# Altium PCB PCB_DCMotor.PcbDoc (part 1 of 2)
Units mm, origin at the board's own origin, x right, y up, seen from the top; angles counter-clockwise.
Board outline 135.2 x 115 mm, 2 copper layers (Top Layer, Bottom Layer); 232 components, 119 nets, 709 pads, 158 vias.
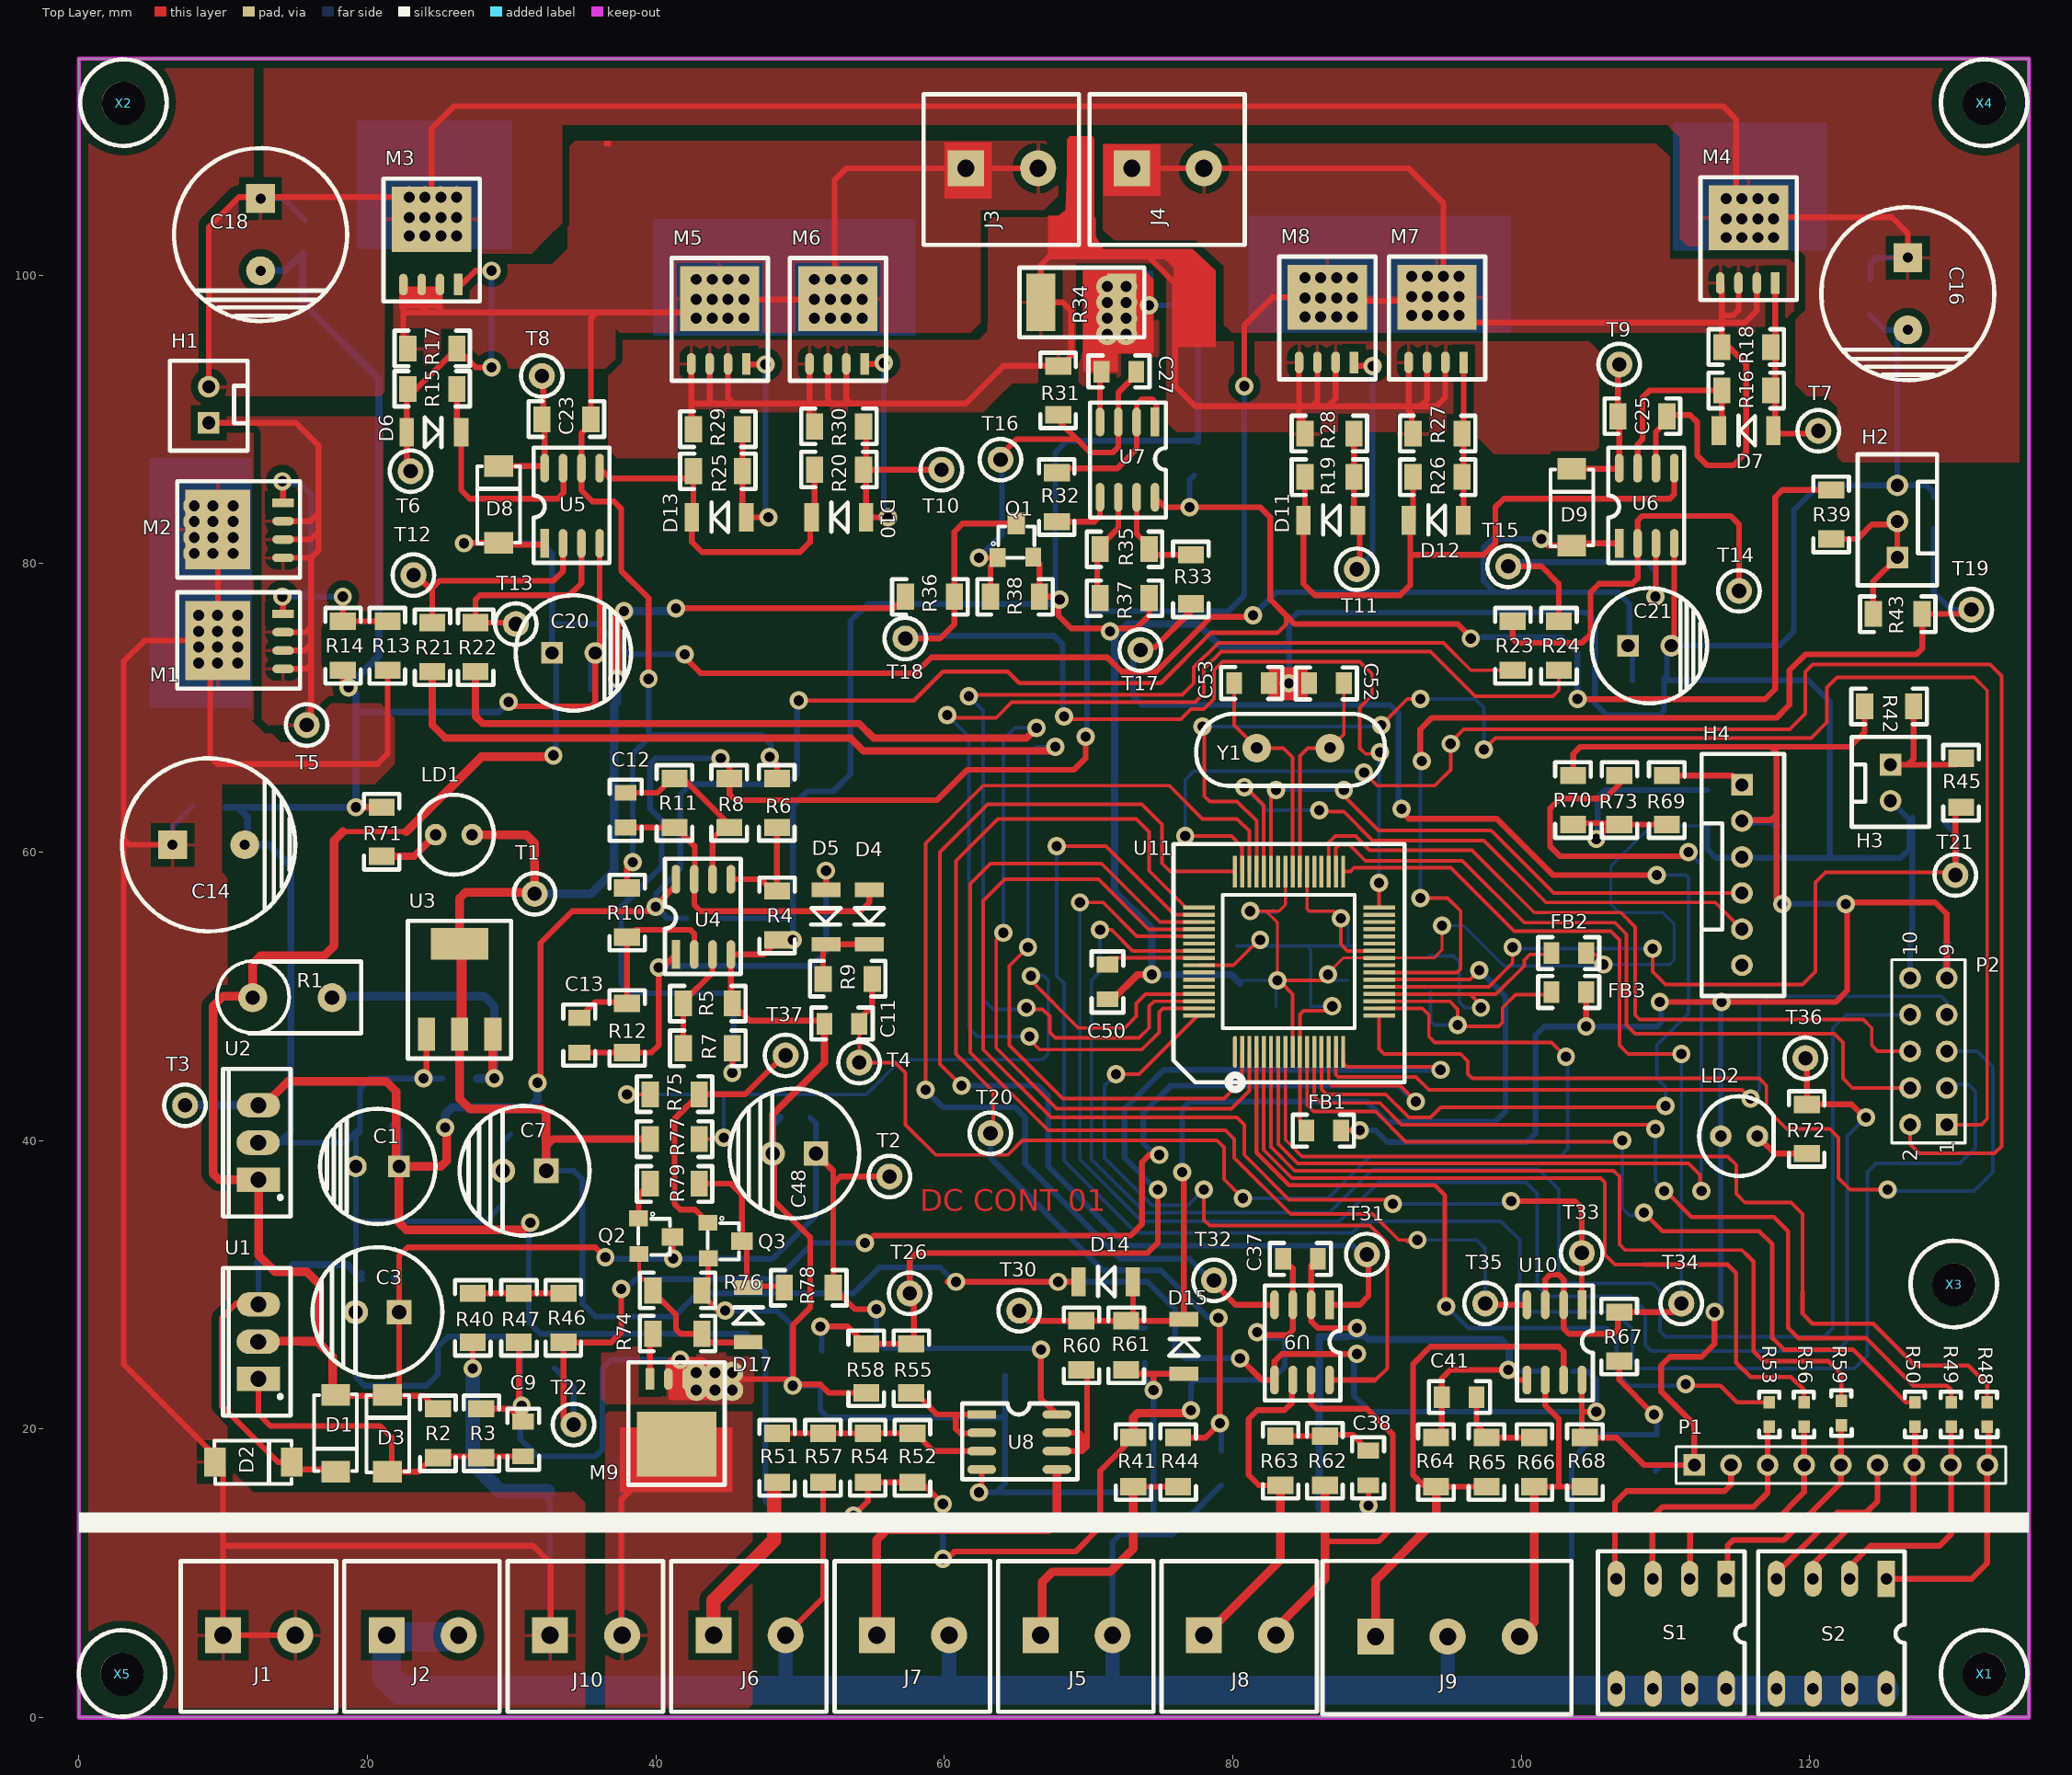
[diagram p0: Top Layer view]
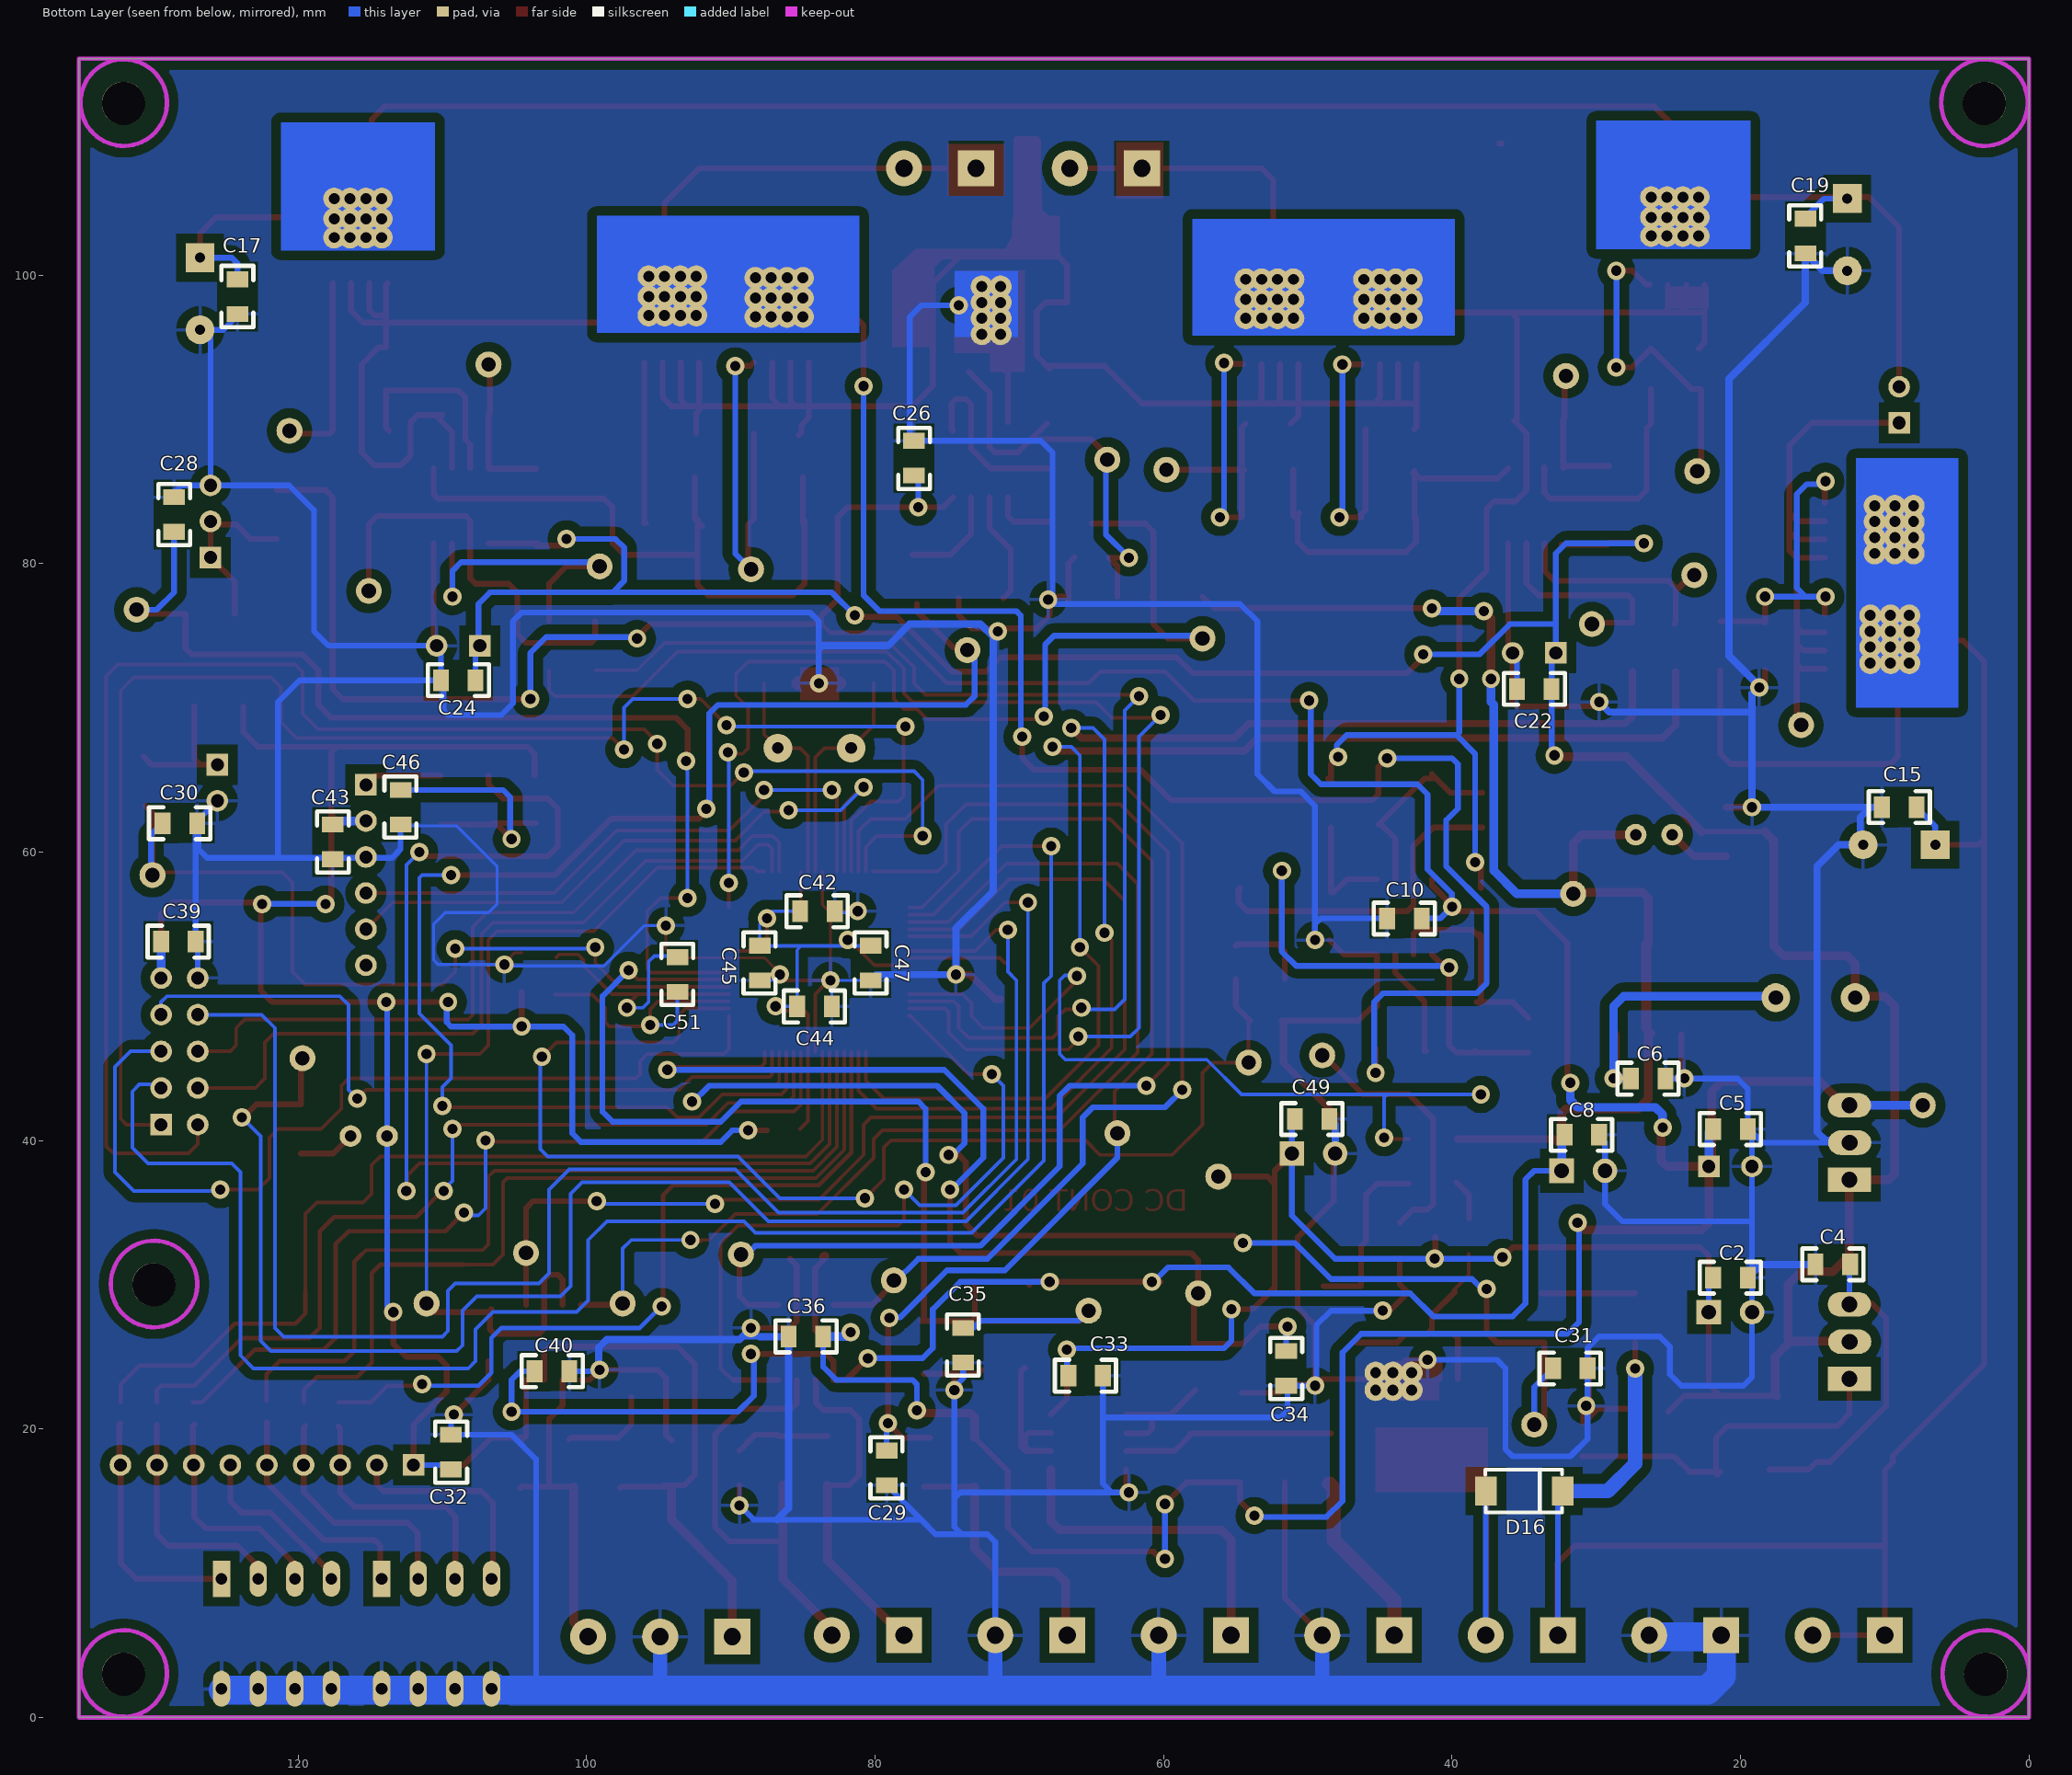
[diagram p1: Bottom Layer view, seen from below]

## Layer stack, top to bottom
Top Layer: signal copper 0.0356
Dielectric: dielectric 0.32, FR-4, Dk 4.8
Bottom Layer: signal copper 0.0356

## Board outline
0,115 0,0 135.2,0 135.2,3.4 135.2,115

## Design rules (kind name [scope] priority, off if disabled: settings)
Clearance [All] p1: gap=0.2
HoleSize [All] p1: absolutevalues=TRUE maxlimit=100 minlimit=0.003 maxpercent=80.000 minpercent=20.000
PolygonConnect [All] p1: connectstyle=Relief reliefconductorwidth=0.254 reliefentries=4 polygonreliefangle="90 Angle"
RoutingVias [All] p1: holewidth=0.711 width=1.27 viastyle="Through Hole" minholewidth=0.711 minwidth=1.27 maxholewidth=0.711 maxwidth=1.27
SolderMaskExpansion [All] p1: expansion=0.102
TestPointUsage [All] p1: valid=0 allowmultiple=FALSE
Testpoint [All] p1: side=15 testpointundercomponent=TRUE minsize=1.016 maxsize=2.54 preferedsize=1.524 minholesize=0 maxholesize=1.016 preferedholesize=0.813 testpointgrid=0.025 style=1023 order=0-112345678
Width [All] p1: maxlimit=100 minlimit=0.2 preferedwidth=0.3
18 further rules are at their usual default settings.

## Classes and differential pairs
component class PG01_Power_Supply: C1 C2 C3 C4 C5 C6 C7 C8 C9 C10 C11 C12 C13 D1 D2 D3 D4 D5 HS1 J1 J2 R1 R2 R3 R4 R5 R6 R7 R8 R9 R10 R11 R12 T1 T2 T3 T4 U1 U2 U3 U4 X1 X2 X3 X4
component class PG02_Full_Bridge: C14 C15 C16 C17 C18 C19 C20 C21 C22 C23 C24 C25 C26 C27 D6 D7 D8 D9 D10 D11 D12 D13 H1 HS2 HS3 HS4 HS5 J3 J4 M1 M2 M3 M4 M5 M6 M7 M8 Q1 R13 R14 R15 R16 R17 R18 R19 R20 R21 R22 R23 R24 R25 R26 R27 R28 R29 R30 R31 R32 R33 R34 R35 R36 R37 R38 T5 T6 T7 T8 T9 T10 T11 T12 T13 T14 T15 T16 T17 T18 U5 U6 U7
component class PG03_Analog_Digital_Inputs: C28 C29 C30 C31 C32 C33 C34 C35 D14 D15 H2 H3 J5 J6 J7 P1 R39 R40 R41 R42 R43 R44 R45 R46 R47 R48 R49 R50 R51 R52 R53 R54 R55 R56 R57 R58 R59 R60 R61 S1 S2 T19 T20 T21 T22 T23 T24 T25 T26 T27 T28 T29 T30 U8
component class PG04_Communications: C36 C37 C38 C39 C40 C41 J8 J9 P2 R62 R63 R64 R65 R66 R67 R68 T31 T32 T33 T34 T35 U9 U10
component class PG05_DSP_Circuit: C42 C43 C44 C45 C46 C47 C48 C49 C50 C51 C52 C53 D16 D17 FB1 FB2 FB3 H4 J10 LD1 LD2 M9 Q2 Q3 R69 R70 R71 R72 R73 R74 R75 R76 R77 R78 R79 T36 T37 U11 Y1

## Components (designator, comment, footprint, x,y, rotation, side; value= is the part's Value field where it differs from the comment)
C1 "Electrolyte Cap" "CAP 5MM" 20.7,38.2 r0 top
C2 "SMD 0805 10%" SMD0805 20.7,30.5 r180 bottom
C3 "Electrolyte Cap" CAP_8mm 20.7,28.1 r180 top
C4 "SMD 0805 10%" SMD0805 13.6,31.4 r0 bottom
C5 "SMD 0805 10%" SMD0805 20.7,40.8 r180 bottom
C6 "SMD 0805 10%" SMD0805 26.4,44.3 r180 bottom
C7 "Electrolyte Cap" CAP_8mm 30.9,37.9 r180 top
C8 "SMD 0805 10%" SMD0805 31,40.4 r180 bottom
C9 "SMD 0805 10%" SMD0805 30.8,19.3 r90 top
C10 "SMD 0805 10%" SMD0805 43.3,55.4 r180 bottom
C11 "SMD 0805 10%" SMD0805 52.9,48.1 r180 top
C12 "SMD 0805 10%" SMD0805 37.9,62.9 r90 top
C13 "SMD 0805 10%" SMD0805 34.7,47.3 r270 top
C14 "Electrolyte Cap" "CAP 10MM DIA" 9,60.5 r180 top
C15 "SMD 0805 10%" SMD0805 9,63.1 r0 bottom
C16 "Electrolyte Cap" "CAP 10MM DIA" 126.8,98.7 r90 top
C17 "SMD 0805 10%" SMD0805 124.2,98.5 r270 bottom
C18 "Electrolyte Cap" "CAP 10MM DIA" 12.6,102.8 r90 top
C19 "SMD 0805 10%" SMD0805 15.5,102.7 r270 bottom
C20 "100uF/25V" "CAP 5MM" 34.3,73.8 r180 top
C21 "100uF/25V" "CAP 5MM" 108.9,74.3 r180 top
C22 "SMD 0805 10%" SMD0805 34.3,71.3 r0 bottom
C23 "SMD 1206 10%" SMD1206 33.8,90 r0 top
C24 "SMD 0805 10%" SMD0805 108.9,71.9 r0 bottom
C25 "SMD 1206 10%" SMD1206 108.4,90.2 r0 top
C26 "SMD 0805 10%" SMD0805 77.3,87.3 r90 bottom
C27 "SMD 0805 10%" SMD0805 72.1,93.3 r180 top
C28 "SMD 0805 10%" SMD0805 128.6,83.4 r90 bottom
C29 "SMD 0805 10%" SMD0805 79.2,17.3 r270 bottom
C30 "SMD 0805 10%" SMD0805 128.2,62 r180 bottom
C31 "SMD 0805 10%" SMD0805 31.8,24.2 r180 bottom
C32 "SMD 0805 10%" SMD0805 109.4,18.4 r90 bottom
C33 "SMD 0805 10%" SMD0805 65.4,23.7 r180 bottom
C34 "SMD 0805 10%" SMD0805 51.5,24.2 r90 bottom
C35 "SMD 0805 10%" SMD0805 73.9,25.8 r270 bottom
C36 "SMD 0805 10%" SMD0805 84.8,26.4 r0 bottom
C37 "SMD 0805 10%" SMD0805 84.7,31.8 r0 top
C38 "SMD 0805 10%" SMD0805 89.4,17.3 r270 top
C39 "SMD 0805 10%" SMD0805 128.3,53.8 r180 bottom
C40 "SMD 0805 10%" SMD0805 102.4,24 r0 bottom
C41 "SMD 0805 10%" SMD0805 95.7,22.2 r180 top
C42 "SMD 0805 10%" SMD0805 84,55.9 r180 bottom
C43 "SMD 0805 10%" SMD0805 117.6,60.7 r90 bottom
C44 "SMD 0805 10%" SMD0805 84.2,49.3 r180 bottom
C45 "SMD 0805 10%" SMD0805 88,52.3 r270 bottom
C46 "SMD 0805 10%" SMD0805 112.9,63.1 r270 bottom
C47 "SMD 0805 10%" SMD0805 80.3,52.3 r270 bottom
C48 "Cap 5mm radial" CAP_8mm 49.6,39.1 r180 top
C49 "SMD 0805 10%" SMD0805 49.7,41.5 r180 bottom
C50 "SMD 0805 10%" SMD0805 71.3,51 r90 top
C51 "SMD 0805 10%" SMD0805 93.7,51.5 r270 bottom
C52 "SMD 0805 10%" SMD0805 86.5,71.7 r0 top
C53 "SMD 0805 10%" SMD0805 81.3,71.7 r180 top
D1 "Diode SMA" DO-214(SMA) 17.8,19.7 r90 top
D2 "Diode SMA" DO-214(SMA) 12.1,17.7 r180 top
D3 "Diode SMA" DO-214(SMA) 21.4,19.7 r270 top
D4 "1N4148" SOD-80 54.8,55.5 r90 top
D5 "1N4148" SOD-80 51.8,55.5 r90 top
D6 "1N4148" SOD-80 24.6,89.1 r180 top
D7 "1N4148" SOD-80 115.6,89.2 r0 top
D8 "UF4007" DO-214(SMA) 29.1,84.1 r270 top
D9 "UF4007" DO-214(SMA) 103.5,83.9 r270 top
D10 "1N4148" SOD-80 52.7,83.2 r0 top
D11 "1N4148" SOD-80 86.8,83 r0 top
D12 "1N4148" SOD-80 94.1,83 r0 top
D13 "1N4148" SOD-80 44.4,83.2 r0 top
D14 "1N4148" SOD-80 71.2,30.2 r0 top
D15 "1N4148" SOD-80 76.6,25.7 r270 top
D16 "Diode SMA" DO-214(SMA) 35,15.7 r0 bottom
D17 "1N4148" SOD-80 46.4,27.9 r270 top
FB1 "Ferrite Bead" SMD0805 86.3,40.7 r0 top
FB2 "Ferrite Bead" SMD0805 103.3,53 r0 top
FB3 "Ferrite Bead" SMD0805 103.3,50.3 r0 top
H1 "Header 2 pin" Header-2-Pin 9,91 r180 top
H2 "10K_Pot" Header-3-Pin 126.1,82.9 r180 top
H3 "Thermistor" Header-2-Pin 125.6,64.8 r0 top
H4 "PICkit3" Header1x6 115.3,58.4 r0 top
J1 "Phonix 2 Pin" PHONIX2 12.5,5.7 r90 top
J2 "Phonix 2 Pin" PHONIX2 23.833,5.7 r90 top
J3 "Phonix 2 Pin" PHONIX2 64,107.4 r90 top
J4 "Phonix 2 Pin" PHONIX2 75.5,107.4 r90 top
J5 "Phonix 2 Pin" PHONIX2 69.167,5.7 r90 top
J6 "Phonix 2 Pin" PHONIX2 46.5,5.7 r90 top
J7 "Phonix 2 Pin" PHONIX2 57.833,5.7 r90 top
J8 "Phonix 2 Pin" PHONIX2 80.5,5.7 r90 top
J9 "Phonix 3 Pin" Phonix_3 94.9,5.6 r180 top
J10 "Phonix 2 Pin" PHONIX2 35.167,5.7 r90 top
LD1 "LED" LED 26,61.2 r180 top
LD2 "LED" LED 115.1,40.3 r0 top
M1 "P MOSFET" SO8-L 11.9,74.6 r90 top
M2 "P MOSFET" SO8-L 11.9,82.3 r90 top
M3 "N MOSFET" SO8-L 24.4,101.6 r0 top
M4 "N MOSFET" SO8-L 115.7,101.7 r0 top
M5 "N MOSFET" SO8-L 44.365,96.1 r0 top
M6 "N MOSFET" SO8-L 52.565,96.1 r0 top
M7 "N MOSFET" SO8-L 94.1,96.2 r0 top
M8 "N MOSFET" SO8-L 86.5,96.2 r0 top
M9 "N MOSFET" SO8-L 41.5,21.2 r180 top
P1 "10K_Resistor_Pack" HDR1X9 112,17.5 r0 top
P2 "Header 5X2" HDR2X5 129.5,41.1 r90 top
Q1 "NPN Transistor" SOT23-3-Leads 65,81.5 r90 top
Q2 "SMD NPN BJT" SOT23-3-Leads 39.9,33.3 r0 top
Q3 "SMD NPN BJT" SOT23-3-Leads 44.7,33 r0 top
R1 "Series Resistor" Axial_2W_Vert 14.8,49.9 r0 top
R2 "SMD 1206 1%" SMD1206 24.9,19.7 r90 top
R3 "SMD 1206 1%" SMD1206 27.9,19.7 r270 top
R4 "SMD 1206 1%" SMD1206 48.4,55.6 r270 top
R5 "SMD 1206 1%" SMD1206 43.6,49.5 r180 top
R6 "SMD 1206 1%" SMD1206 48.4,63.4 r90 top
R7 "SMD 1206 1%" SMD1206 43.6,46.4 r180 top
R8 "SMD 1206 1%" SMD1206 45.1,63.4 r90 top
R9 "SMD 1206 1%" SMD1206 53.3,51.2 r0 top
R10 "SMD 1206 1%" SMD1206 38,55.8 r270 top
R11 "SMD 1206 1%" SMD1206 41.3,63.4 r90 top
R12 "SMD 1206 1%" SMD1206 38,47.8 r270 top
R13 "SMD 1206 1%" SMD1206 21.4,74.3 r90 top
R14 "SMD 1206 1%" SMD1206 18.3,74.3 r270 top
R15 "SMD 1206 1%" SMD1206 24.5,92.1 r0 top
R16 "SMD 1206 1%" SMD1206 115.6,92 r180 top
R17 "SMD 1206 1%" SMD1206 24.5,94.9 r0 top
R18 "SMD 1206 1%" SMD1206 115.6,95 r0 top
R19 "SMD 1206 1%" SMD1206 86.7,86 r180 top
R20 "SMD 1206 1%" SMD1206 52.7,86.5 r0 top
R21 "SMD 1206 1%" SMD1206 24.5,74.2 r270 top
R22 "SMD 1206 1%" SMD1206 27.5,74.2 r270 top
R23 "SMD 1206 1%" SMD1206 99.4,74.3 r270 top
R24 "SMD 1206 1%" SMD1206 102.6,74.3 r270 top
R25 "SMD 1206 1%" SMD1206 44.3,86.4 r180 top
R26 "SMD 1206 1%" SMD1206 94.2,86 r180 top
R27 "SMD 1206 1%" SMD1206 94.2,89 r0 top
R28 "SMD 1206 1%" SMD1206 86.7,89 r0 top
R29 "SMD 1206 1%" SMD1206 44.3,89.3 r0 top
R30 "SMD 1206 1%" SMD1206 52.7,89.5 r0 top
R31 "SMD 1206 1%" SMD1206 67.9,92 r90 top
R32 "SMD 1206 1%" SMD1206 67.8,84.6 r90 top
R33 "SMD 1206 1%" SMD1206 77.1,78.9 r90 top
R34 "CRA2512" SMD2512 69.5,98.1 r180 top
R35 "SMD 1206 1%" SMD1206 72.5,81 r180 top
R36 "SMD 1206 1%" SMD1206 59,77.7 r180 top
R37 "SMD 1206 1%" SMD1206 72.5,77.6 r180 top
R38 "SMD 1206 1%" SMD1206 64.9,77.7 r180 top
R39 "SMD 1206 1%" SMD1206 121.5,83.4 r90 top
R40 "SMD 1206 1%" SMD1206 27.3,27.7 r270 top
R41 "SMD 1206 1%" SMD1206 73.1,17.7 r270 top
R42 "SMD 1206 1%" SMD1206 125.5,70.1 r180 top
R43 "SMD 1206 1%" SMD1206 126.1,76.5 r180 top
R44 "SMD 1206 1%" SMD1206 76.2,17.7 r270 top
R45 "SMD 1206 1%" SMD1206 130.5,64.8 r90 top
R46 "SMD 1206 1%" SMD1206 33.6,27.7 r90 top
R47 "SMD 1206 1%" SMD1206 30.5,27.7 r270 top
R48 "SMD 0603 1%" SMD0603 132.3,21 r270 top
R49 "SMD 0603 1%" SMD0603 129.8,21 r270 top
R50 "SMD 0603 1%" SMD0603 127.3,21 r270 top
R51 "SMD 1206 1%" SMD1206 48.4,18 r270 top
R52 "SMD 1206 1%" SMD1206 57.8,18 r90 top
R53 "SMD 0603 1%" SMD0603 117.2,21 r270 top
R54 "SMD 1206 1%" SMD1206 54.7,18 r90 top
R55 "SMD 1206 1%" SMD1206 57.7,24.2 r270 top
R56 "SMD 0603 1%" SMD0603 119.6,21 r270 top
R57 "SMD 1206 1%" SMD1206 51.6,18 r90 top
R58 "SMD 1206 1%" SMD1206 54.6,24.2 r90 top
R59 "SMD 0603 1%" SMD0603 122.2,21.1 r270 top
R60 "SMD 1206 1%" SMD1206 69.5,25.8 r270 top
R61 "SMD 1206 1%" SMD1206 72.6,25.8 r270 top
R62 "SMD 1206 1%" SMD1206 86.4,17.8 r90 top
R63 "SMD 1206 1%" SMD1206 83.3,17.8 r270 top
R64 "SMD 1206 1%" SMD1206 94.1,17.7 r90 top
R65 "SMD 1206 1%" SMD1206 97.6,17.7 r90 top
R66 "SMD 1206 1%" SMD1206 100.9,17.7 r270 top
R67 "SMD 1206 1%" SMD1206 106.8,26.4 r90 top
R68 "SMD 1206 1%" SMD1206 104.4,17.7 r270 top
R69 "SMD 1206 1%" SMD1206 110.1,63.6 r90 top
R70 "SMD 1206 1%" SMD1206 103.6,63.6 r90 top
R71 "SMD 1206 1%" SMD1206 21,61.4 r90 top
R72 "SMD 1206 1%" SMD1206 119.8,40.8 r90 top
R73 "SMD 1206 1%" SMD1206 106.8,63.6 r270 top
R74 "SMD 1206 1%" SMD1206 41.5,26.6 r0 top
R75 "SMD 1206 1%" SMD1206 41.3,43.2 r0 top
R76 "SMD 1206 1%" SMD1206 41.5,29.6 r0 top
R77 "SMD 1206 1%" SMD1206 41.3,40.1 r180 top
R78 "SMD 1206 1%" SMD1206 50.6,29.8 r180 top
R79 "SMD 1206 1%" SMD1206 41.3,37 r180 top
S1 "2.54mm DIP-4 SMD" DIP8 110.4,5.8 r270 top
S2 "2.54mm DIP-4 SMD" DIP8 121.5,5.8 r270 top
T1 "Through hole TestPoint" TP 31.6,57.1 r0 top
T2 "Through hole TestPoint" TP 56.2,37.5 r0 top
T3 "Through hole TestPoint" TP 7.363,42.437 r0 top
T4 "Through hole TestPoint" TP 54.1,45.4 r0 top
T5 "Through hole TestPoint" TP 15.8,68.8 r0 top
T6 "Through hole TestPoint" TP 23,86.4 r0 top
T7 "Through hole TestPoint" TP 120.6,89.2 r0 top
T8 "Through hole TestPoint" TP 32.1,93 r0 top
T9 "Through hole TestPoint" TP 106.8,93.8 r0 top
T10 "Through hole TestPoint" TP 59.8,86.5 r0 top
T11 "Through hole TestPoint" TP 88.6,79.6 r0 top
T12 "Through hole TestPoint" TP 23.2,79.2 r0 top
T13 "Through hole TestPoint" TP 30.3,75.8 r0 top
T14 "Through hole TestPoint" TP 115.1,78.1 r0 top
T15 "Through hole TestPoint" TP 99.1,79.8 r0 top
T16 "Through hole TestPoint" TP 63.9,87.2 r0 top
T17 "Through hole TestPoint" TP 73.6,74 r0 top
T18 "Through hole TestPoint" TP 57.3,74.8 r0 top
T19 "Through hole TestPoint" TP 131.2,76.8 r0 top
T20 "Through hole TestPoint" TP 63.2,40.5 r0 top
T21 "Through hole TestPoint" TP 130.1,58.4 r0 top
T22 "Through hole TestPoint" TP 34.3,20.3 r0 top
T26 "Through hole TestPoint" TP 57.6,29.4 r0 top
T30 "Through hole TestPoint" TP 65.2,28.2 r0 top
T31 "Through hole TestPoint" TP 89.3,32.1 r0 top
T32 "Through hole TestPoint" TP 78.7,30.3 r0 top
T33 "Through hole TestPoint" TP 104.2,32.2 r0 top
T34 "Through hole TestPoint" TP 111.1,28.7 r0 top
T35 "Through hole TestPoint" TP 97.5,28.7 r0 top
T36 "Through hole TestPoint" TP 119.7,45.7 r0 top
T37 "Through hole TestPoint" TP 49,45.9 r0 top
U1 "LM317" TO220_Normal 12.4,26 r90 top
U2 "LM7805" TO220_Normal 12.4,39.8 r90 top
U3 "3.3V Regulator" SOT-223 26.4,50.5 r0 top
U4 "LM358" SOIC-8 43.3,55.5 r90 top
U5 "LM5109B" SOIC-8 34.2,84 r90 top
U6 "LM5109B" SOIC-8 108.7,84 r90 top
U7 "LM358" SOIC-8 72.7,87.2 r270 top
U8 "LM358" SOIC-8 65.2,19.1 r0 top
U9 "CAN Transciver" SOIC-8 84.8,26 r270 top
U10 "MAX485" SOIC-8 102.3,26 r270 top
U11 "DSP" Quad64 83.9,52.4 r90 top
X1 "TP" Screw 132.1,3 r0 top
X2 "TP" Screw 3.1,111.9 r0 top
X3 "TP" Screw 130,30 r0 top
X4 "TP" Screw 132.1,111.9 r0 top
X5 "TP" Screw 3,3 r0 top (schematic designator X1)
Y1 "7.3728MHz" XTAL 84.2,67.2 r180 top

## Footprints (in the part's own frame and the unit in brackets; to place one, negate y for a bottom-side part, rotate by r counter-clockwise, add the part's x,y. Pads: shape width x height; smd on the part's side, far side on the other; paste and mask are expansions set on the pad)
Axial_2W_Vert [mm]
  round 2 hole 1: 1(-2.75,0) 2(2.75,0)
  silkscreen extent -5.22,-2.46 4.77,2.54
"CAP 5MM" [mm]
  rect 1.5x1.5 hole 0.9: 1(1.499,0)
  round 1.5 hole 0.9: 2(-1.499,0)
  silkscreen extent -3.98,-4 4.02,4
"CAP 10MM DIA" [mm]
  rect 2x2 hole 0.7: 1(2.5,0)
  round 2 hole 0.7: 2(-2.5,0)
  silkscreen extent -6,-6 6,6
CAP_8mm [mm]
  rect 1.7x1.7 hole 1: 1(-1.5,0)
  round 1.7 hole 1: 2(1.5,0)
  silkscreen extent -4.5,-4.5 4.5,4.5
DIP8 [mm]
  rect 2.5x1.2 hole 0.8: 1(-3.81,3.81)
  oval 2.5x1.2 hole 0.8: 2(-3.81,1.27) 3(-3.81,-1.27) 4(-3.81,-3.81) 5(3.81,-3.81) 6(3.81,-1.27) 7(3.81,1.27) 8(3.81,3.81)
  silkscreen extent -5.71,-5.08 5.56,5.08
DO-214(SMA) [mm]
  rect 1.5x2 smd: 1(2.662,0) 2(-2.662,0)
  silkscreen extent -2.63,-1.47 2.71,1.5
HDR1X9 [mm] "Connector; Header; 9 Position"
  rect 1.5x1.5 hole 0.9: 1(0,0)
  round 1.5 hole 0.9: 2(2.54,0) 3(5.08,0) 4(7.62,0) 5(10.16,0) 6(12.7,0) 7(15.24,0) 8(17.78,0) 9(20.32,0)
  silkscreen extent -1.27,-1.27 21.59,1.27
HDR2X5 [mm] "Connector; Header; 5x2 Position"
  rect 1.5x1.5 hole 0.9: 1(0,0)
  round 1.5 hole 0.9: 2(0,2.54) 3(2.54,0) 4(2.54,2.54) 5(5.08,0) 6(5.08,2.54) 7(7.62,0) 8(7.62,2.54) 9(10.16,0) 10(10.16,2.54)
  silkscreen extent -1.27,-1.27 11.43,3.81
Header1x6 [mm]
  rect 1.5x1.5 hole 0.9: 1(0,6.25)
  round 1.5 hole 0.9: 2(0,3.75) 3(0,1.25) 4(0,-1.25) 5(0,-3.75) 6(0,-6.25)
  silkscreen extent -2.79,-8.38 2.92,8.41
Header-2-Pin [mm]
  rect 1.5x1.5 hole 0.9: 1(0,1.25)
  round 1.5 hole 0.9: 2(0,-1.25)
  silkscreen extent -2.69,-3.05 2.69,3.17
Header-3-Pin [mm]
  rect 1.5x1.5 hole 0.9: 1(0.025,2.48)
  round 1.5 hole 0.9: 2(0.025,-0.02) 3(0.025,-2.52)
  silkscreen extent -2.72,-4.67 2.77,4.42
LED [mm]
  round 1.5 hole 0.8: 1(-1.27,0) 2(1.27,0)
  silkscreen extent -2.77,-2.77 2.4,2.77
PHONIX2 [mm]
  rect 2.5x2.5 hole 1.2: 1(0,2.5)
  round 2.5 hole 1.2: 2(0,-2.5)
  silkscreen extent -5.31,-5.33 5.13,5.44
Phonix_3 [mm]
  rect 2.5x2.5 hole 1.2: 1(5,0)
  round 2.5 hole 1.2: 2(0,0) 3(-5,0)
  silkscreen extent -8.59,-5.26 8.69,5.38
Quad64 [mm]
  oval 2.2x0.28 smd: 1(-6.25,3.75)
  rect 2.2x0.28 smd: 2(-6.25,3.25) 3(-6.25,2.75) 4(-6.25,2.25) 5(-6.25,1.75) 6(-6.25,1.25) 7(-6.25,0.75) 8(-6.25,0.25) 9(-6.25,-0.25) 10(-6.25,-0.75) 11(-6.25,-1.25) 12(-6.25,-1.75) 13(-6.25,-2.25) 14(-6.25,-2.75) 15(-6.25,-3.25) 16(-6.25,-3.75) 33(6.25,-3.75) 34(6.25,-3.25) 35(6.25,-2.75) 36(6.25,-2.25) 37(6.25,-1.75) 38(6.25,-1.25) 39(6.25,-0.75) 40(6.25,-0.25) 41(6.25,0.25) 42(6.25,0.75) 43(6.25,1.25) 44(6.25,1.75) 45(6.25,2.25) 46(6.25,2.75) 47(6.25,3.25) 48(6.25,3.75)
  rect 0.28x2.2 smd: 17(-3.75,-6.25) 18(-3.25,-6.25) 19(-2.75,-6.25) 20(-2.25,-6.25) 21(-1.75,-6.25) 22(-1.25,-6.25) 23(-0.75,-6.25) 24(-0.25,-6.25) 25(0.25,-6.25) 26(0.75,-6.25) 27(1.25,-6.25) 28(1.75,-6.25) 29(2.25,-6.25) 30(2.75,-6.25) 31(3.25,-6.25) 32(3.75,-6.25) 49(3.75,6.25) 50(3.25,6.25) 51(2.75,6.25) 52(2.25,6.25) 53(1.75,6.25) 54(1.25,6.25) 55(0.75,6.25) 56(0.25,6.25) 57(-0.25,6.25) 58(-0.75,6.25) 59(-1.25,6.25) 60(-1.75,6.25) 61(-2.25,6.25) 62(-2.75,6.25) 63(-3.25,6.25) 64(-3.75,6.25)
  silkscreen extent -8.86,-8.01 8.15,8.02
Screw [mm]
  round 3 hole 3 unplated: ""(0,0)
  Keep-Out Layer circle w0.3: c-0.011,0.051 r3
  silkscreen extent -3.01,-2.95 2.99,3.05
SMD0603 [mm]
  rect 0.85x0.8 smd: 1(-0.846,0) 2(0.846,0)
  silkscreen extent -1.57,-0.71 1.57,0.71
SMD0805 [mm]
  rect 1.1x1.5 smd: 1(-1.202,0) 2(1.202,0)
  silkscreen extent -2.13,-1.12 2.11,1.09
SMD1206 [mm]
  rect 1.2x1.8 smd: 1(-1.699,0) 2(1.699,0)
  silkscreen extent -2.62,-1.22 2.62,1.24
SMD2512 [mm]
  rect 2x4 smd: 1(-2.794,0) 2(2.8,0)
  silkscreen extent -4.37,-2.41 4.29,2.41
SO8-L [mm]
  oval 0.6x1.5 smd: 1(-1.905,-2.261) 2(-0.635,-2.261) 3(0.635,-2.261)
  rect 0.6x1.5 smd: 4(1.905,-2.261)
  rect 5.5x4.5 smd: 5(0.051,2.261)
  silkscreen extent -3.28,-3.43 3.4,5.08
SOD-80 [mm]
  rect 1x2 smd: 1(1.877,0) 2(-1.902,0)
  silkscreen extent -0.53,-1.02 0.61,1.04
SOIC-8 [mm]
  rect 2x0.6 smd: 1(-2.607,1.905)
  oval 2x0.6 smd: 2(-2.607,0.635) 3(-2.607,-0.635) 4(-2.607,-1.905) 5(2.607,-1.905) 6(2.607,-0.635) 7(2.607,0.635) 8(2.607,1.905)
  silkscreen extent -3.95,-2.59 4.02,2.67
SOT23-3-Leads [mm] "SOT23, 3-Leads, Body 3.0x2.6mm (max), Pitch 0.95mm, IPC Medium Density"
  rect 1.3x1.1 smd: 1(-1.092,1.305) 2(-1.067,-1.168)
  rect 1.5x1.2 smd: 3(1.263,0.018)
  silkscreen extent -1.12,-1.24 1.07,1.72
SOT-223 [mm]
  rect 1.2x2.3 smd: 1(-2.3,-3.145) 2(0,-3.145) 3(2.3,-3.145)
  rect 4x2.2 smd: 4(-0.01,3.145)
  silkscreen extent -3.59,-4.82 3.57,4.73
TO220_Normal [mm]
  rect 1.7x3 hole 1.1: 1(-2.519,-0.054)
  oval 1.7x3 hole 1.1: 2(0.046,-0.029) 3(2.637,-0.054)
  silkscreen extent -5.07,-2.28 5.16,2.41
TP [mm]
  round 1.8 hole 1: 1(0,0)
  silkscreen extent -1.45,-1.44 1.43,1.44
XTAL [mm]
  round 2 hole 0.8: 1(-2.54,0) 2(2.54,0)
  silkscreen extent -6.35,-2.38 6.74,2.63

## Part data
C1 C3 C7 C14 C16 C18 C20 C21: library part CAP
C2 C4 C5 C6 C8 C9 C10 C11 C12 C13 C15 C17 C19 C22 C23 C24 C25 C26 C27 C28 C29 C30 C31 C32 C33 C34 C35 C36 C37 C38 C39 C40 C41 C42 C43 C44 C45 C46 C47 C49 C50 C51 C52 C53: library part CAP_SMD
C48: library part CAP_Electolytic_5mm
D1 D2 D3 D16: library part Diode_SMA
D8 D9: library part 1N4148
FB1 FB2 FB3: library part R_3
H1 H3: library part Header_2_Pin
H2: library part Header_3_Pin
H4: library part Header_6_Pin
J1 J2 J3 J4 J5 J6 J7 J8 J10: library part Phonix_2_Pin
J9: library part Phonix_3_Pin
M1 M2: library part PMOS_SQJ457EP
M3 M4 M5 M6 M7 M8 M9: library part MOS_PSMN013-60YL
P1: library part "Header 9", "Header, 9-Pin"
P2: "Header, 5-Pin, Dual row"
Q1 Q2 Q3: library part 2N3904_1
R1 R34: library part RES_TH
R2 R3 R4 R5 R6 R7 R8 R9 R10 R11 R12 R13 R14 R15 R16 R17 R18 R19 R20 R21 R22 R23 R24 R25 R26 R27 R28 R29 R30 R31 R32 R33 R35 R36 R37 R38 R39 R40 R41 R42 R43 R44 R45 R46 R47 R48 R49 R50 R51 R52 R53 R54 R55 R56 R57 R58 R59 R60 R61 R62 R63 R64 R65 R66 R67 R68 R69 R70 R71 R72 R73 R74 R75 R76 R77 R78 R79: library part RES_SMD
S1 S2: library part "SW DIP-4", "DIP Switch, 4 Position, SPST"
T1 T2 T3 T4 T5 T6 T7 T8 T9 T10 T11 T12 T13 T14 T15 T16 T17 T18 T19 T20 T21 T22 T26 T30 T31 T32 T33 T34 T35 T36 T37: library part TestPoint_TH
U3: library part LM1117
U5 U6: library part IR2106
U9: library part NCV7351
U11: library part dsPIC33EP64MC506
X1 X2 X3 X4 X5: library part "TEST POINT_0"
Y1: library part Crystal

## Free pads (board coordinates)
  round 1.524 hole 0.762: 8(8,80.7) 8(8,81.8) 8(8,82.9) 8(8,84) 8(8.3,73.1) 8(8.3,74.2) 8(8.3,75.3) 8(8.3,76.4) 8(22.9,102.7) 8(24,102.7) 8(25.1,102.7) 8(26.2,102.7) 8(42.8,97) 8(43.9,97) 8(45,97) 8(46.1,97) 8(51,97) 8(52.1,97) 8(53.2,97) 8(54.3,97) 8(85,97.1) 8(86.1,97.1) 8(87.2,97.1) 8(88.3,97.1) 8(92.4,97.2) 8(93.5,97.2) 8(94.6,97.2) 8(95.7,97.2) 8(114.2,102.6) 8(115.3,102.6) 8(116.4,102.6) 8(117.5,102.6) 9(9.3,80.7) 9(9.3,81.8) 9(9.3,82.9) 9(9.3,84) 9(9.6,73.1) 9(9.6,74.2) 9(9.6,75.3) 9(9.6,76.4) 9(22.9,104) 9(24,104) 9(25.1,104) 9(26.2,104) 9(42.8,98.3) 9(43.9,98.3) 9(45,98.3) 9(46.1,98.3) 9(51,98.3) 9(52.1,98.3) 9(53.2,98.3) 9(54.3,98.3) 9(85,98.4) 9(86.1,98.4) 9(87.2,98.4) 9(88.3,98.4) 9(92.4,98.5) 9(93.5,98.5) 9(94.6,98.5) 9(95.7,98.5) 9(114.2,103.9) 9(115.3,103.9) 9(116.4,103.9) 9(117.5,103.9) 10(10.7,80.7) 10(10.7,81.8) 10(10.7,82.9) 10(10.7,84) 10(11,73.1) 10(11,74.2) 10(11,75.3) 10(11,76.4) 10(22.9,105.4) 10(24,105.4) 10(25.1,105.4) 10(26.2,105.4) 10(42.8,99.7) 10(43.9,99.7) 10(45,99.7) 10(46.1,99.7) 10(51,99.7) 10(52.1,99.7) 10(53.2,99.7) 10(54.3,99.7) 10(85,99.8) 10(86.1,99.8) 10(87.2,99.8) 10(88.3,99.8) 10(92.4,99.9) 10(93.5,99.9) 10(94.6,99.9) 10(95.7,99.9) 10(114.2,105.3) 10(115.3,105.3) 10(116.4,105.3) 10(117.5,105.3) 11(71.3,95.9) 11(71.3,97) 11(71.3,98.1) 11(71.3,99.2) 12(72.6,95.9) 12(72.6,97) 12(72.6,98.1) 12(72.6,99.2) 13(42.8,22.7) 13(42.8,23.9) 14(44.1,22.7) 14(44.1,23.9) 15(45.3,22.7) 15(45.3,23.9)

## Via types
v1: diameter 1.27, hole 0.711, Top Layer to Bottom Layer, 158 vias

## Nets (pads, with @x,y where several pads share a name; then routed paths per layer and width w, separated by ;. In a path a pad name is that pad's centre, name@x,y a point inside that pad or via, vN(x,y) a via of type N, cw(c..) or ccw(c..) an arc to the next point about the centre after c; other vN are vias at no path point)
BEMF_A: C23.2 J3.1 J3.2 M3.1 M3.2 M3.3 M5.5 M6.5 pad.8@42.8,97 pad.8@43.9,97 pad.8@45,97 pad.8@46.1,97 pad.8@51,97 pad.8@52.1,97 pad.8@53.2,97 pad.8@54.3,97 pad.9@42.8,98.3 pad.9@43.9,98.3 pad.9@45,98.3 pad.9@46.1,98.3 pad.9@51,98.3 pad.9@52.1,98.3 pad.9@53.2,98.3 pad.9@54.3,98.3 pad.10@42.8,99.7 pad.10@43.9,99.7 pad.10@45,99.7 pad.10@46.1,99.7 pad.10@51,99.7 pad.10@52.1,99.7 pad.10@53.2,99.7 pad.10@54.3,99.7 R6.2 R10.1 R17.1 U5.6 | length 116.6
  Top Layer w0.4: M3.1@22.495,99.339 22.495,97.4 ; R17.1@22.9,94.9 22.495,95.305 22.495,97.4 ; M3.2@23.765,99.339 23.765,97.835 24.2,97.4 ; M3.3@25.035,99.339 25.035,97.665 25.3,97.4 ; C23.2@35.499,90 35.499,96.999 35.9,97.4 ; C23.2@35.7,89.9 34.835,89.035 U5.6@34.835,86.607 34.835,85.065 35.6,84.3 37.1,84.3 37.6,83.8 37.6,79.5 39.5,77.6 v1(39.5,72) ; R10.1@38,57.499 38,58.9 v1(38.4,59.3) ; M5.5@43.9,97.6 43.7,97.4 35.9,97.4 ; M5.5@44.7,98.2 44.8,98.3 52.4,98.3 52.4,106.6 53.2,107.4 J3.1@61.5,107.4 J3.2@66.5,107.4 ; v1@48,66.6 v1(47.9,66.6) 48.4,66.1 R6.2@48.4,65.099 ; R6.2@48.3,64.8 R6.2@48.6,65.1 ; 22.495,97.4 24.2,97.4 ; 24.2,97.4 25.3,97.4 ; 25.3,97.4 35.9,97.4
  Bottom Layer w0.4: v1(38.4,59.3) 38.4,66.8 39.7,68.1 ; v1@39.4,72.2 39.5,72.1 v1(39.5,72) 39.5,68.3 39.7,68.1 ; v1@48,66.5 48,67.4 47.3,68.1 39.7,68.1
BEMF_B: C25.2 J4.1 J4.2 M4.1 M4.2 M4.3 M7.5 M8.5 pad.8@85,97.1 pad.8@86.1,97.1 pad.8@87.2,97.1 pad.8@88.3,97.1 pad.8@92.4,97.2 pad.8@93.5,97.2 pad.8@94.6,97.2 pad.8@95.7,97.2 pad.9@85,98.4 pad.9@86.1,98.4 pad.9@87.2,98.4 pad.9@88.3,98.4 pad.9@92.4,98.5 pad.9@93.5,98.5 pad.9@94.6,98.5 pad.9@95.7,98.5 pad.10@85,99.8 pad.10@86.1,99.8 pad.10@87.2,99.8 pad.10@88.3,99.8 pad.10@92.4,99.9 pad.10@93.5,99.9 pad.10@94.6,99.9 pad.10@95.7,99.9 R7.1 R8.2 R18.1 U6.6 | length 207.2
  Top Layer w0.4: v1(44.5,66.5) 45.1,65.9 R8.2@45.1,65.099 45.1,64 45.5,63.6 55.8,63.6 ; v1(45.3,44.7) R7.1@45.299,46.4 ; 58.8,63.6 55.8,63.6 ; v1(69.8,68) 69.8,66.5 69,65.7 61.6,65.7 59.5,63.6 55.8,63.6 ; J4.1@73,107.4 J4.2@78,107.4 92.2,107.4 94.6,105 94.6,98.2 86.6,98.2 M8.5@86.5,98.1 ; v1(80.8,92.3) 80.8,96.5 82.761,98.461 M8.5@86.551,98.461 ; M7.5@94.1,98.7 96.1,96.7 113.901,96.7 ; U6.6@109.335,86.607 109.335,89.135 C25.2@110.3,90.1 ; C25.2@110,90.3 111.7,90.3 112.2,89.8 112.2,87.5 112.9,86.8 114.7,86.8 115.6,87.7 115.6,93.8 114.4,95 R18.1@113.901,95 113.901,96.7 ; M4.1@113.795,99.439 113.901,99.334 113.901,97.2 ; M4.2@115.065,99.439 115.065,97.565 114.7,97.2 113.901,97.2 ; M4.3@116.335,99.439 116.335,97.535 115.5,96.7 113.901,96.7 ; 113.901,96.7 113.901,97.2
  Bottom Layer w0.4: v1(44.5,66.5) 40,66.5 39.6,66.1 39.6,63 40.4,62.2 40.4,59 37.6,56.2 37.6,50.9 38.3,50.2 44.8,50.2 45.4,49.6 v1@45.4,44.6 ; v1(69.8,68) 69.9,68.1 69.9,76.4 70.2,76.7 72.8,76.7 79.7,76.7 80.8,77.8 80.8,81.7 ; 80.8,81.3 80.8,81.7 ; v1(80.8,92.3) 80.8,81.7
CAN_H: J8.2 R62.1 U9.7 | length 32.3
  Top Layer w0.4: U9.7@85.435,23.393 85.435,21.765 85.8,21.4 89.3,21.4 91.1,19.6 91.1,14.7 ; 86.4,12.2 90.1,12.2 91.1,13.2 91.1,14.7 ; R62.1@86.4,16.101 R62.1@86.4,16.2 ; 91.1,14.2 91.1,14.7
  Top Layer w0.6: J8.2@83,5.5 83,6.2 86.4,9.6 86.4,12.2 R62.1@86.4,16.101
CAN_L: J8.1 R63.2 U9.6 | length 24.1
  Top Layer w0.4: R63.2@83.3,16.101 81.799,16.101 81.1,16.8 81.1,20.7 81.7,21.3 83.6,21.3 84.1,21.8 84.1,23.328 U9.6@84.165,23.393
  Top Layer w0.6: J8.1@78,5.7 78.1,5.7 83.3,10.9 R63.2@83.3,16.101
CLK_OUT: P2.1 U11.45 | length 111
  Top Layer w0.25: v1(77.9,68.7) 78.033,68.567 78.033,63.867 78.4,63.5 80.3,63.5 81.65,62.15 U11.45@81.65,58.65 ; v1(90.3,68.8) 92.1,70.6 v1(93,70.6) ; v1(97.4,67.1) 98.2,67.9 106.3,67.9 ; 103.5,67.9 106.3,67.9 ; P2.1@129.5,41.1 131.9,41.1 132.3,41.5 132.3,71.2 131.4,72.1 121.9,72.1 121.2,71.4 121.2,69 120.1,67.9 106.3,67.9
  Bottom Layer w0.25: v1(77.9,68.7) 88.5,68.7 ; 89.1,68.7 88.5,68.7 ; v1(90.3,68.8) 90.2,68.7 88.5,68.7 ; v1(93,70.6) 96.8,70.6 97.4,70 v1(97.4,67.1)
CON_RS485_A: J9.3 R66.2 R68.2 U10.6 | length 22.6
  Top Layer w0.4: R66.2@100.9,16.001 102.6,16.001 ; U10.6@101.665,23.393 101.665,21.635 102.6,20.7 102.6,16.001 ; R68.2@104.6,15.9 104.499,16.001 R68.2@104.4,16.001 102.6,16.001
  Top Layer w0.6: J9.3@99.7,5.5 99.8,5.5 100.9,6.6 R66.2@100.9,16.001
CON_RS485_B: J9.1 R64.1 R65.1 U10.7 | length 39.2
  Top Layer w0.4: R64.1@94.1,16.001 R64.1@94.8,16.001 ; R65.1@97.7,15.9 R65.1@97.6,16.001 R64.1@94.8,16.001 ; U10.7@102.935,23.393 102.935,25.365 102.6,25.7 93.7,25.7 92.5,24.5 92.5,16.8 93.2,16.1 94.701,16.1 R64.1@94.8,16.001
  Top Layer w0.6: J9.1@89.9,5.6 89.9,9.5 94.1,13.7 R64.1@94.1,16.001
CS: P2.7 U11.15 | length 52.3
  Top Layer w0.25: U11.15@87.15,46.15 87.15,44.55 87.3,44.4 92.7,44.4 93.6,43.5 115.3,43.5 v1(115.9,42.9)
  Bottom Layer w0.25: v1@115.7,42.8 115.8,42.8 v1(115.9,42.9) 116.5,43.5 116.5,49.4 117.1,50 129.1,50 129.5,49.6 P2.7@129.5,48.72
GND: C1.2 C2.2 C3.2 C4.2 C5.2 C6.2 C7.2 C8.2 C9.2 C10.1 C11.2 C14.2 C15.2 C16.2 C17.2 C18.2 C19.2 C20.2 C21.2 C22.2 C24.2 C26.2 C27.2 C28.2 C29.2 C30.2 C31.2 C32.2 C33.2 C34.1 C35.2 C36.2 C37.2 C38.2 C39.2 C40.1 C41.2 C42.2 C43.1 C44.2 C45.2 C46.2 C47.2 C48.2 C49.2 C50.1 C52.1 C53.1 D15.1 FB2.2 H2.3 H3.2 H4.3 J2.1 J2.2 J5.2 J6.2 J7.2 J9.2 M9.1 M9.2 M9.3 P2.10 pad.11 pad.12 pad.13 pad.14 pad.15 Q1.2 Q3.2 R3.1 R4.2 R5.1 R14.2 R34.1 R37.1 R38.1 R47.2 R57.1 R58.1 R61.2 R64.2 R67.1 R71.2 R76.2 S1.5 S1.6 S1.7 S1.8 S2.5 S2.6 S2.7 S2.8 U2.2 U3.1 U4.4 U5.4 U6.4 U7.4 U8.4 U9.2 U10.5 U11.9 U11.25 U11.41 | length 999.7
  Top Layer w0.2: v1(81.2,55.9) 82.3,55.9 ; v1(83.1,51.1) 83.1,55.1 82.3,55.9 ; U11.41@83.65,58.65 83.65,56.35 83.2,55.9 82.3,55.9 ; v1@86.5,51.5 87.65,52.65 U11.25@90.15,52.65 93.95,52.65 94.5,53.2 v1(94.5,54.9) ; v1@86.55,51.55 v1@86.574,51.574 ; FB2.2@104.502,53 105,53 v1@105.9,52.1
  Top Layer w0.25: v1(83.1,51.1) 86.2,51.1 v1(86.6,51.5) ; v1@83.4,50.9 84.15,50.15 U11.9@84.15,46.15
  Top Layer w0.4: R14.2@18.3,72.601 18.3,71.8 v1(18.7,71.4) ; v1(23.9,44.3) 24.1,44.5 U3.1@24.1,47.355 ; R3.1@27.9,21.399 29.901,21.399 C9.2@30.9,20.4 ; v1(29.8,70.4) 30.1,70.1 35.5,70.1 35.799,70.399 C20.2@35.799,73.8 ; R47.2@30.5,26.001 30.5,20.8 C9.2@30.9,20.4 ; v1(30.7,21.6) 30.9,21.4 C9.2@30.9,20.4 ; C20.2@35.7,73.6 36.105,74.005 U5.4@36.105,81.393 ; M9.2@42.135,23.461 M9.3@40.865,23.461 40.865,24.565 41.1,24.8 v1(41.7,24.8) 43.2,24.8 43.405,24.595 M9.1@43.405,23.461 49.039,23.461 v1(49.5,23) ; Q3.2@43.633,31.832 43.633,30.033 43.1,29.5 43.1,29.4 44.3,28.2 v1@44.7,28.2 ; R5.1@45.299,49.5 46.499,48.3 C11.2@51.8,48.3 ; R5.1@45.4,49.1 45.205,49.295 U4.4@45.205,52.893 47.493,52.893 R4.2@48.5,53.9 ; C48.2@48.2,39.3 48.2,35.8 50.7,33.3 50.7,28.4 49.5,27.2 v1(49.5,23) ; J6.2@48.8,5.6 48.8,5.5 51.6,8.3 R57.1@51.6,16.301 ; v1@49.7,22.8 v1(49.5,23) ; v1@49.7,23.1 51.4,23.1 51.999,22.501 R58.1@54.6,22.501 ; v1(62.4,15.6) 62.593,15.793 U8.4@62.593,17.195 ; Q1.2@66.168,80.433 66.6,80.002 R38.1@66.6,77.3 ; R38.1@66.599,77.7 67.8,77.7 v1(68,77.5) ; v1@67.9,77.6 67.9,76.4 68.8,75.5 v1@70.9,75.5 ; U7.4@70.795,89.807 70.795,93.197 C27.2@70.898,93.3 ; C27.2@71.1,93.4 70.5,94 70.5,97.7 70.9,98.1 R34.1@72.294,98.1 74,98.1 v1(74.2,97.9) ; v1(71.5,75.3) 71.1,75.3 v1@70.9,75.5 ; R61.2@72.6,24.101 72.878,23.823 74.5,23.823 ; R37.1@74.199,77.6 74.199,76.399 73.3,75.5 v1@70.9,75.5 ; v1(74.5,22.7) 74.5,23.823 ; D15.1@76.6,23.823 74.5,23.823 ; C37.2@85.902,31.8 85.435,31.333 U9.2@85.435,28.607 85.435,27.465 85.9,27 v1(88.6,27) v1@88.7,27 ; v1(89.4,14.7) C38.2@89.4,16.098 ; R64.2@94.1,19.2 94.498,19.598 C41.2@94.498,22.2 94.498,23.498 95.1,24.1 99,24.1 v1@99.05,24.05 ; v1(99.1,24.1) 99.807,23.393 U10.5@100.395,23.393 ; R67.1@106.8,24.701 106.8,23.4 v1(109.2,21) ; C21.2@110.2,74.1 110.605,74.505 U6.4@110.605,81.393 ; v1@44.7,28.2 v1(44.8,28.2) v1@44.7,28.2
  Top Layer w0.5: v1@19.201,63.099 R71.2@21,63.099 ; C48.2@48.1,39.2 48.1,41.8 51.698,45.398 C11.2@51.698,48.1 ; C50.1@71.3,49.798 71.698,49.798 73.4,51.5 v1(74.4,51.5)
  Top Layer w1: C53.1@82.502,71.7 v1(83.9,71.7) C52.1@85.298,71.7
  Bottom Layer w0.2: C47.2@80.5,51.098 v1@82.602,51.098 ; v1(81.2,55.9) 81.298,55.802 82.998,55.802 C42.2@82.8,56 ; C44.2@82.998,49.3 82.998,50.702 v1@82.602,51.098 ; v1(83.1,51.1) v1@82.602,51.098 ; v1(86.6,51.5) 87.002,51.098 C45.2@88,51.098 ; v1(94.5,54.9) 96,54.9 98.8,52.1 105.6,52.1 v1(105.7,52.2) 110.3,52.2 110.6,52.5 110.6,55 109.8,55.8 106.8,55.8 106.2,56.4 106.2,59 109,61.8 C46.2@113.1,61.8
  Bottom Layer w0.4: U2.2@12.429,39.847 18.447,39.847 C5.2@19.498,40.898 ; v1(18.7,71.4) v1@18.7,71.5 ; C2.2@19.2,30.4 C3.2@19.2,28.1 19.2,23.6 19.8,23 24.1,23 24.9,23.8 24.9,25.7 25.6,26.4 29.8,26.4 30.598,25.602 C31.2@30.598,24.2 30.598,21.698 v1@30.4,21.5 ; C5.2@19.498,40.8 C5.2@19.498,40.898 ; C5.2@19.5,40.6 19.201,40.301 C1.2@19.201,38.2 19.201,34.4 ; C5.2@19.5,40.9 C5.2@19.498,40.898 ; C2.2@19.6,30.5 C2.2@19.45,30.65 ; C2.2@19.6,30.8 C2.2@19.45,30.65 ; C6.2@25.198,44.3 v1(23.9,44.3) 20.2,44.3 19.498,43.598 C5.2@19.498,40.898 ; J2.2@26.2,5.7 J2.2@26.333,5.7 J2.2@26.5,5.7 ; C8.2@29.9,40.4 29.4,39.9 C7.2@29.4,37.9 29.4,35.6 28.2,34.4 19.201,34.4 ; v1@30.8,21.7 v1(30.7,21.6) 30.6,21.5 30.6,19.3 31.8,18.1 35.8,18.1 36.3,18.6 36.3,24.2 36.9,24.8 v1(41.7,24.8) ; C22.2@35.502,71.3 35.502,73.503 C20.2@35.799,73.8 ; C10.1@44.502,55.4 49.1,55.4 49.5,55 ; v1(44.8,28.2) 48.4,28.2 49.4,27.2 v1@49.4,23 ; v1(49.5,53.9) 49.5,55 ; v1@49.502,22.998 C34.1@51.4,22.998 ; C34.1@51.4,23.1 C34.1@51.4,22.998 ; C34.1@51.5,22.998 C34.1@51.4,22.998 ; v1(62.4,15.6) 63.6,15.6 ; C33.2@64.198,23.7 64.198,20.8 ; v1(68,77.5) 67.7,77.8 67.7,87.7 68.502,88.502 C26.2@77.3,88.502 ; v1@68.2,77.3 68.1,77.2 54.7,77.2 53.5,76 53.5,65.4 52.3,64.2 50.5,64.2 49.5,63.2 49.5,55 ; J5.2@71.667,5.7 71.667,12.167 72.2,12.7 74,12.7 ; C35.2@73.9,24.598 73.9,23.5 v1@74.6,22.8 ; v1(74.2,97.9) 76.8,97.9 77.6,97.1 C26.2@77.6,88.6 ; v1(74.5,22.7) 74.5,15.2 ; C26.2@77.3,88.6 C26.2@77.6,88.6 ; C26.2@77.6,88.4 C26.2@77.6,88.6 ; C29.2@79.2,16.098 76.811,13.71 ; 83.6,74.3 83.9,74 ; v1(83.9,71.7) 83.9,74 ; 88,26.4 89.2,26.4 ; v1(89.4,14.7) 88.41,13.71 86.8,13.71 76.811,13.71 ; v1(99.1,24.1) 99.2,24 C40.1@101.198,24 ; 103.5,1.7 103.5,1.9 103.5,17.9 105.202,19.602 C32.2@109.4,19.602 v1@109.4,20.8 ; S1.5@106.59,1.99 S1.6@109.13,1.99 S1.7@111.67,1.99 S1.8@114.21,1.99 S2.5@117.69,1.99 S2.6@120.23,1.99 S2.7@122.77,1.99 ; C24.2@109.9,72 109.9,69.8 109.6,69.5 105.9,69.5 105.1,70.3 105.1,76 104.5,76.6 84.5,76.6 83.9,76 83.9,74 ; C21.2@110.399,74.3 C21.2@110.5,74.3 ; C46.2@112.9,61.898 112.9,60.2 113.5,59.6 121.4,59.6 ; C17.2@124.151,97.249 125.2,96.2 C16.2@126.6,96.2 ; S2.8@125.2,1.99 S2.8@125.31,1.99 ; H3.2@125.6,63.6 H3.2@125.6,63.55 126.998,62.152 C30.2@126.998,62 ; H2.3@125.9,85.5 H2.3@126.075,85.5 ; C16.2@126.8,96.4 C16.2@126.6,96.2 ; C30.2@126.9,62.1 126.9,60.2 126.3,59.6 121.4,59.6 ; P2.10@126.96,51.26 126.96,53.96 C39.2@127,54 ; C39.2@127.098,53.8 127.098,62.398 C30.2@127.1,62.4 ; C28.2@128.6,84.602 C28.2@128.6,85 ; C28.2@128.7,84.6 128.8,84.7 128.08,85.42 H2.3@126.2,85.42 ; 19.201,34.4 19.201,30.899 C2.2@19.45,30.65 ; C34.1@51.4,22.998 51.4,21.3 51.9,20.8 64.198,20.8 ; 63.6,15.6 74.1,15.6 74.5,15.2 ; 63.6,15.6 64.198,16.198 64.198,20.8 ; 74,12.7 74.5,13.2 74.5,15.2 ; 74,12.7 75.802,12.7 76.811,13.71 ; C21.2@110.5,74.3 110.102,73.902 C24.2@110.102,71.9 119.9,71.9 121.4,70.4 121.4,59.6 ; C21.2@110.5,74.3 117.9,74.3 118.9,75.3 118.9,83.7 120.62,85.42 H2.3@126.075,85.42 ; H2.3@126.075,85.42 H2.3@126.2,85.42 ; H2.3@126.075,85.42 H2.3@126.075,85.5 ; H2.3@126.075,85.42 H2.3@126.2,85.42 ; H2.3@126.075,85.5 126.075,95.675 C16.2@126.6,96.2
  Bottom Layer w0.5: C15.2@10.202,63.1 10.4,63.1 11,63.1 ; C14.2@11.5,60.5 C14.2@11.7,60.5 ; C14.2@11.6,60.3 C14.2@11.7,60.4 ; U2.2@12.2,40.1 12.3,40 14.1,40 14.7,40.6 14.7,59 13.2,60.5 C14.2@11.7,60.5 ; C18.2@12.6,100.3 14.302,100.3 C19.2@15.5,101.498 15.5,98.1 20.8,92.8 20.8,73.6 v1@18.7,71.5 ; C4.2@14.802,31.4 18.6,31.4 C2.2@19.4,30.6 ; v1@18.6,71.4 v1@18.7,71.5 ; C2.2@19.499,30.501 C2.2@19.6,30.4 ; v1@29.9,70.5 v1(29.8,70.4) 29.1,69.7 19.2,69.7 ; C48.2@48.1,39.1 48.1,41.1 C49.2@48.6,41.6 ; C47.2@80.5,50.9 79.9,51.5 v1(74.4,51.5) 74.4,54.7 71.8,57.3 71.8,74.9 72.7,75.8 77.6,75.8 79.1,74.3 83.6,74.3 83.8,74.3 ; 86.8,13.71 86.002,14.508 C36.2@86.002,26.4 88,26.4 ; v1(88.6,27) 89.2,26.4 89.4,26.2 98.6,26.2 99.151,25.649 99.151,24.151 v1(99.1,24.1) ; 11,63.1 11.7,62.4 C14.2@11.7,60.5 ; 11,63.1 v1(19.2,63.1) 19.2,69.7 ; v1@18.7,71.5 19.2,71 19.2,69.7
  Bottom Layer w1: 48.6,2.2 49,2.6 J6.2@49,5.7 ; 60.1,2.1 60.333,2.333 J7.2@60.333,5.7 ; J5.2@71.667,5.7 71.667,1.933 71.7,1.9 ; J9.2@94.9,5.6 94.9,2.2 95,2.1
  Bottom Layer w2: J2.2@26.2,5.6 21.433,5.6 J2.1@21.333,5.7 21.333,2.867 22.3,1.9 71.7,1.9 103.5,1.9 106.2,1.9 106.4,2.1 106.6,1.9 S2.8@125.2,1.9
INT: P2.2 U11.47 | length 114.7
  Top Layer w0.25: v1(76.7,61.1) 77.9,61.1 79.9,61.1 80.65,60.35 U11.47@80.65,58.65 ; v1(89.1,65.5) 90,64.6 94,64.6 95.1,65.7 v1(95.1,67.5) ; P2.2@126.96,41.1 126.96,39.74 127.6,39.1 132.8,39.1 133.3,39.6 133.3,55.4 ; 133.3,55.6 133.3,55.4 ; v1(95.1,67.5) v1@95.1,67.6 ; v1(95.1,67.5) v1@95.1,67.6 ; v1@95.1,67.6 96,68.5 118.6,68.5 119.7,69.6 119.7,72.5 120.2,73 132.5,73 133.3,72.2 133.3,55.4
  Bottom Layer w0.25: v1(76.7,61.1) 76.7,65 77.3,65.6 v1@89,65.6
MCLR: C46.1 R69.1 R70.1 R73.2 | length 19.4
  Top Layer w0.4: R70.1@103.5,62 106.5,62 R73.2@106.599,61.901 ; v1(105.2,60.9) 106.201,61.901 R73.2@106.599,61.901 ; R69.1@110.1,61.901 R73.2@106.8,61.901 ; R73.2@106.599,61.901 R73.2@106.8,61.901 ; R73.2@106.599,61.901 R73.2@106.8,61.901
  Bottom Layer w0.4: v1(105.2,60.9) 105.3,61 105.3,63.8 105.802,64.302 C46.1@112.9,64.302
NetC4_1: C4.1 D1.2 D2.2 U1.3 | length 22.3
  Top Layer w0.4: U1.3@12.8,28.6 12.7,28.7 10.9,28.7 9.9,27.7 9.9,21.6 13.8,17.7 D2.2@14.762,17.7 15.262,17.2 D1.2@18,17.2
  Bottom Layer w0.4: C4.1@12.3,31.5 12.454,31.346 U1.3@12.454,28.637
NetC6_1: C6.1 R1.2 U3.3 | length 21
  Top Layer w0.6: U3.3@28.7,47.355 28.7,44.4 v1(28.8,44.3)
  Bottom Layer w0.6: R1.2@17.4,50 28.1,50 28.8,49.3 v1(28.8,44.3) C6.1@27.602,44.3
NetC9_1: C9.1 D3.1 R2.1 R3.2 U1.1 | length 25.1
  Top Layer w0.4: U1.1@12.454,23.481 12.454,21.046 13.3,20.2 20.9,20.2 21.7,19.4 21.7,16.9 21.6,16.8 D3.1@21.6,16.9 ; D3.1@21.4,17.038 23.538,17.038 24.6,18.1 C9.1@31,18.1
NetC12_1: C12.1 D4.1 R11.1 U4.7 | length 23
  Top Layer w0.4: C12.1@37.9,61.698 41.302,61.698 41.7,61.3 41.8,61.3 42.7,60.4 42.7,58.142 U4.7@42.665,58.107 42.665,56.335 43.1,55.9 54.2,55.9 54.8,56.5 54.8,57.4 D4.1@54.7,57.5
NetC12_2: C12.2 R8.1 R11.2 U4.6 | length 13.4
  Top Layer w0.4: C12.2@37.9,64.102 40.102,64.102 R11.2@41.4,65.4 ; R11.2@41.3,65.099 41.901,65.099 R8.1@45.1,61.9 ; U4.6@43.935,58.107 43.935,60.935 R8.1@44.9,61.9
NetC13_1: C13.1 R10.2 R12.1 U4.2 | length 15.2
  Top Layer w0.4: C13.1@34.7,48.502 35.798,49.6 R12.1@38,49.6 ; R12.1@38,49.499 R12.1@38,49.6 ; R10.2@38.1,54.1 38.6,54.6 42.4,54.6 42.665,54.335 U4.2@42.665,52.893 ; R10.2@38.1,54.3 38,54.2 R12.1@38,49.6 ; R12.1@38.3,49.6 R12.1@38,49.6
NetC13_2: C13.2 D5.1 R12.2 U4.1 | length 31.9
  Top Layer w0.4: C13.2@34.7,46.098 39.698,46.098 40.2,46.6 40.2,51.698 U4.1@41.395,52.893 ; R12.2@38.298,46.098 R12.2@38.4,46.2 ; D5.1@51.8,57.377 v1(51.8,58.7)
  Bottom Layer w0.4: v1@39.9,52.1 50.8,52.1 51.8,53.1 v1(51.8,58.7)
  other v1: 40.2,52
NetC16_1: C16.1 C17.1 C18.1 C19.1 H1.2 M3.5 M4.5 pad.8@22.9,102.7 pad.8@24,102.7 pad.8@25.1,102.7 pad.8@26.2,102.7 pad.8@114.2,102.6 pad.8@115.3,102.6 pad.8@116.4,102.6 pad.8@117.5,102.6 pad.9@22.9,104 pad.9@24,104 pad.9@25.1,104 pad.9@26.2,104 pad.9@114.2,103.9 pad.9@115.3,103.9 pad.9@116.4,103.9 pad.9@117.5,103.9 pad.10@22.9,105.4 pad.10@24,105.4 pad.10@25.1,105.4 pad.10@26.2,105.4 pad.10@114.2,105.3 pad.10@115.3,105.3 pad.10@116.4,105.3 pad.10@117.5,105.3 | length 153.3
  Top Layer w0.4: H1.2@9,92.25 9,103.3 11.1,105.4 C18.1@12.6,105.4 ; M3.5@24.3,105.4 C18.1@12.7,105.4 ; M3.5@24.451,103.861 24.451,110.151 26,111.7 114,111.7 114.9,110.8 114.9,104.7 115.6,104 125.7,104 126.8,102.9 C16.1@126.8,101 ; C18.1@12.6,105.4 C18.1@12.7,105.4 ; C18.1@12.6,105.4 C18.1@12.7,105.4
  Bottom Layer w0.4: C18.1@12.6,105.3 14.2,105.3 C19.1@15.7,103.8 ; C17.1@124.2,99.702 124.2,100.8 124.6,101.2 C16.1@126.8,101.2
NetC23_1: C23.1 D8.2 T8.1 U5.8 | length 9.9
  Top Layer w0.4: D8.2@29.1,86.762 32.14,86.762 U5.8@32.295,86.607 32.295,90.005 32.2,90.1 32.2,92.9 T8.1@32,93.1
NetC25_1: C25.1 D9.2 T9.1 U6.8 | length 10.9
  Top Layer w0.4: D9.2@103.5,86.562 106.75,86.562 U6.8@106.795,86.607 106.795,90.305 106.7,90.4 106.7,93.7 T9.1@107,94
NetC27_1: C27.1 Q1.1 R31.1 R38.2 T16.1 U7.3 | length 28.7
  Top Layer w0.4: v1(62.4,80.4) 63.687,80.4 Q1.1@63.695,80.408 ; R38.2@63.201,77.7 63.201,79.801 Q1.1@63.8,80.4 ; T16.1@63.7,87.3 63.75,87.35 65.024,88.624 69.176,88.624 ; 68.1,89.7 69.176,88.624 ; C27.1@73.5,93.3 72.065,91.865 U7.3@72.065,89.807 72.065,88.065 71.7,87.7 70.1,87.7 69.176,88.624
  Bottom Layer w0.4: v1(62.4,80.4) 64,82 T16.1@64,87.4
NetC38_1: C38.1 R62.2 R63.1 | length 6.6
  Top Layer w0.4: R63.1@83.3,19.499 R62.2@86.4,19.499 86.699,19.499 86.8,19.6 88.302,19.6 C38.1@89.4,18.502
NetC41_1: C41.1 R65.2 R66.1 | length 6.6
  Top Layer w0.4: C41.1@96.902,22.2 96.902,20.298 97.8,19.4 101.1,19.4 R66.1@101.2,19.3
NetC42_1: C42.1 C44.1 C45.1 C47.1 FB1.1 U11.10 U11.26 U11.38 U11.57 | length 44.2
  Top Layer w0.2: U11.38@85.15,58.65 85.15,56.05 85.3,55.9 87,55.9 v1(87.5,55.4)
  Top Layer w0.25: U11.57@77.65,52.15 80.05,52.15 81.8,53.9 v1(81.9,53.9) ; FB1.1@85.2,40.8 84.65,41.35 U11.10@84.65,46.15 84.65,48.75 84.9,49 86.6,49 v1(86.9,49.3) ; v1(87.5,55.4) 87.5,53.6 87.95,53.15 U11.26@90.15,53.15
  Bottom Layer w0.2: 85.1,53.502 85.402,53.2 C44.1@85.402,49.3 87,49.3 v1@87.1,49.2 ; C42.1@85.202,55.9 87.1,55.9 88,55 C45.1@88,53.502
  Bottom Layer w0.25: C47.1@80.3,53.502 85.1,53.502 C45.1@88,53.502 88.198,53.502 88.2,53.5 C45.1@88.1,53.5
NetC50_2: C50.2 U11.56 | length 6.8
  Top Layer w0.25: C50.2@71,52.3 71.35,52.65 U11.56@77.65,52.65
NetC51_1: C51.1 FB2.1 U11.20 | length 21.3
  Top Layer w0.25: U11.20@90.15,50.15 96.45,50.15 ; v1@97.3,49.3 96.45,50.15 ; FB2.1@102.1,52.7 101.9,52.9 100.6,52.9 100.2,52.5 100.2,52.1 98.25,50.15 96.45,50.15
  Bottom Layer w0.25: C51.1@93.6,52.8 95.3,52.8 95.7,52.4 95.7,49.6 96.1,49.2 v1(97.2,49.2)
NetC51_2: C51.2 FB3.1 U11.19 | length 20.1
  Top Layer w0.25: U11.19@90.15,49.65 94.1,49.65 ; 94.9,49.65 94.1,49.65 ; FB3.1@102.2,50.1 99.6,50.1 98.7,49.2 98.7,48.2 98.42,47.92 95.68,47.92 v1(95.6,48) 95.6,49.1 95.05,49.65 94.1,49.65
  Bottom Layer w0.25: C51.2@93.7,50.298 93.7,48.3 94,48 v1(95.6,48) ; v1(95.6,48) 95.8,48 v1(95.6,48)
NetC52_2: C52.2 U11.39 Y1.1 | length 15.7
  Top Layer w0.25: U11.39@84.65,58.65 84.65,66.65 85.2,67.2 Y1.1@87.2,67.2 ; Y1.1@86.74,67.2 87.702,68.162 C52.2@87.702,71.7
NetC53_2: C53.2 U11.40 Y1.2 | length 15.8
  Top Layer w0.25: C53.2@80.098,71.7 80.098,68.802 Y1.2@81.7,67.2 ; Y1.2@81.66,67.2 Y1.2@81.7,67.2 ; U11.40@84.15,58.65 84.15,66.55 83.5,67.2 Y1.2@81.7,67.2
NetD4_2: D4.2 D5.2 R9.1 | length 5.8
  Top Layer w0.4: R9.1@51.601,51.2 51.601,53.098 D5.2@52.1,53.598 ; D5.2@51.8,53.598 D5.2@52.1,53.598 ; D4.2@55,53.5 54.902,53.598 D4.2@54.8,53.598 D5.2@52.1,53.598
NetD6_1: D6.1 M3.4 R15.1 R17.2 T6.1 | length 23.1
  Top Layer w0.4: T6.1@23.1,86.3 23,86.3 22.723,86.577 D6.1@22.723,89.1 22.723,92.022 R15.1@22.801,92.1 23.399,92.1 R17.2@26.199,94.9 27.499,93.6 v1(28.6,93.6) ; M3.4@26.305,99.339 26.539,99.339 27.5,100.3 v1(28.6,100.3)
  Bottom Layer w0.4: v1@28.5,100.4 v1(28.6,100.3) v1(28.6,93.6)
NetD6_2: D6.2 R15.2 U5.7 | length 16.1
  Top Layer w0.4: R15.2@26.199,92.1 26.199,89.701 D6.2@26.5,89.4 ; D6.2@26.502,89.1 26.502,85.098 27.1,84.5 33.2,84.5 33.6,84.9 U5.7@33.6,86.7
NetD7_1: D7.1 M4.4 R16.1 R18.2 T7.1 | length 13.6
  Top Layer w0.4: M4.4@117.605,99.439 117.605,95 117.605,89.195 117.8,89 120.6,89 T7.1@120.8,89.2
NetD7_2: D7.2 R16.2 U6.7 | length 13.6
  Top Layer w0.4: U6.7@108.065,86.607 108.065,88.265 108.4,88.6 108.4,91.5 108.9,92 R16.2@113.901,92 113.901,89.403 D7.2@113.698,89.2
NetD10_1: D10.1 M6.4 R20.2 R30.2 T10.1 | length 25.8
  Top Layer w0.4: R30.2@54.3,89.7 54.577,89.423 R20.2@54.577,86.5 ; R20.2@54.399,86.5 R20.2@54.577,86.5 ; M6.4@54.47,93.839 55.739,93.839 v1(55.8,93.9) ; v1(56.1,83.2) D10.1@54.577,83.2 R20.2@54.577,86.5 ; T10.1@60,86.5 R20.2@54.577,86.5
  Bottom Layer w0.4: v1(55.8,93.9) 55.8,83.6 v1@56.1,83.3
NetD10_2: D10.2 D13.2 R20.1 R25.2 U5.5 | length 26.5
  Top Layer w0.4: U5.5@36.105,86.607 36.812,85.9 42.201,85.9 42.601,86.3 R25.2@42.7,86.3 ; D13.2@42.498,83.2 42.498,81.502 43.2,80.8 50,80.8 50.7,81.5 50.7,83.4 D10.2@50.6,83.5 ; D13.2@42.601,83.101 R25.2@42.601,86.4 ; D10.2@50.7,83 51.001,83.301 R20.1@51.001,86.5